# EAGLE board M8340E (EAGLE 6.6.0), part 1 of 2
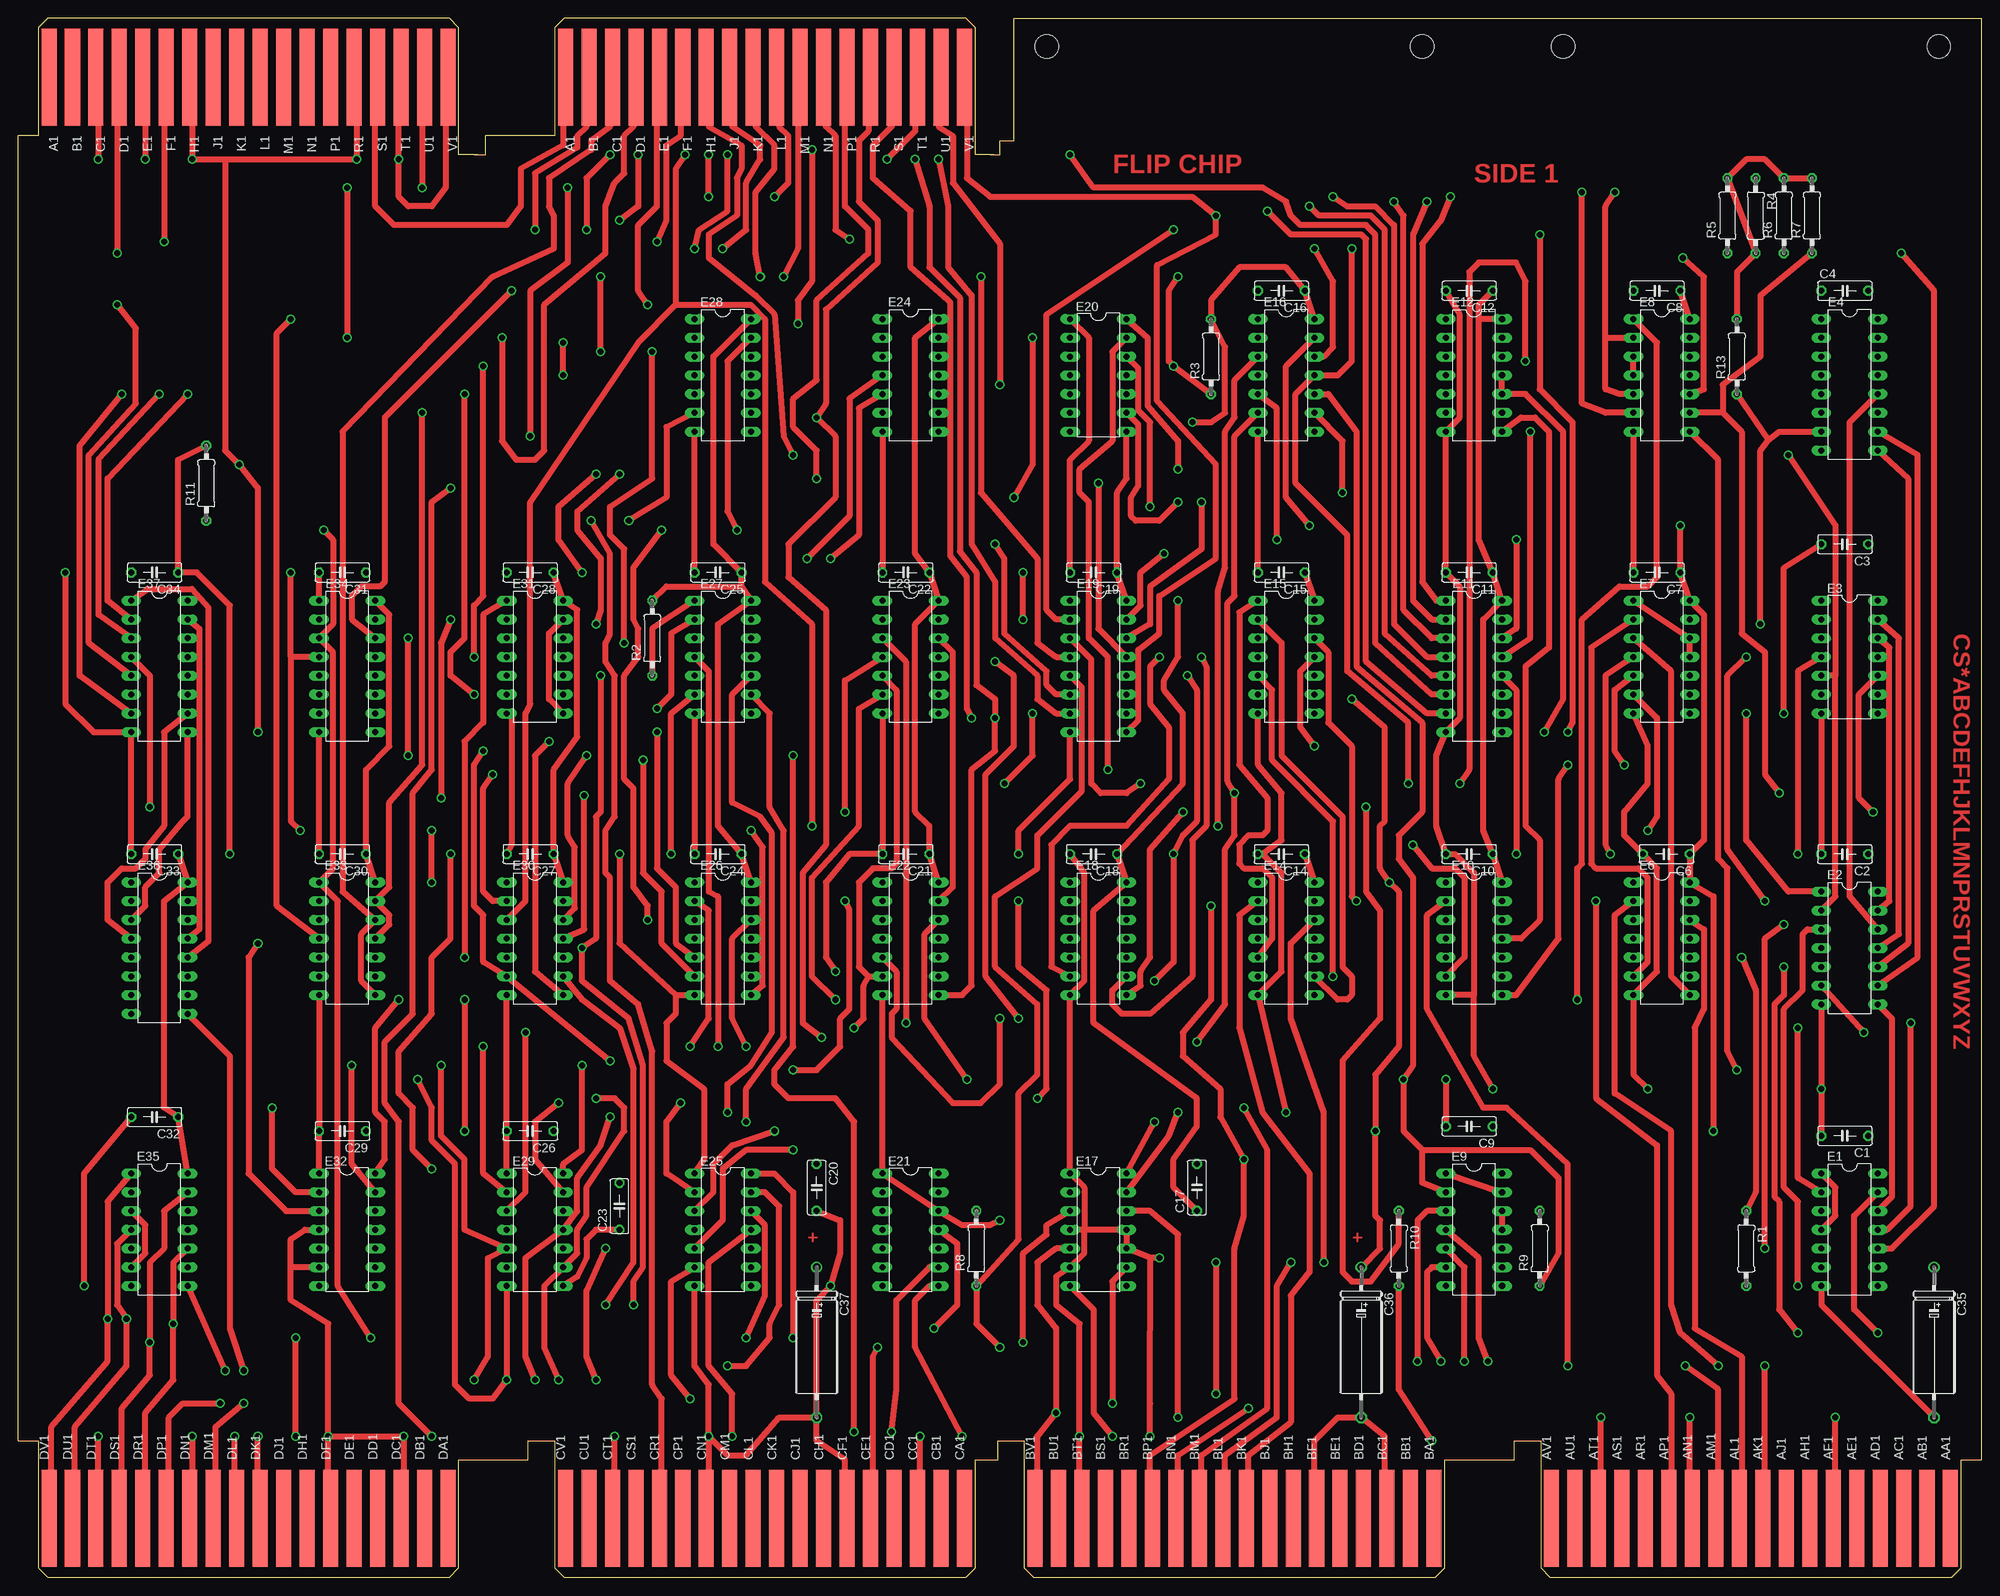
[diagram p0: board, top side]
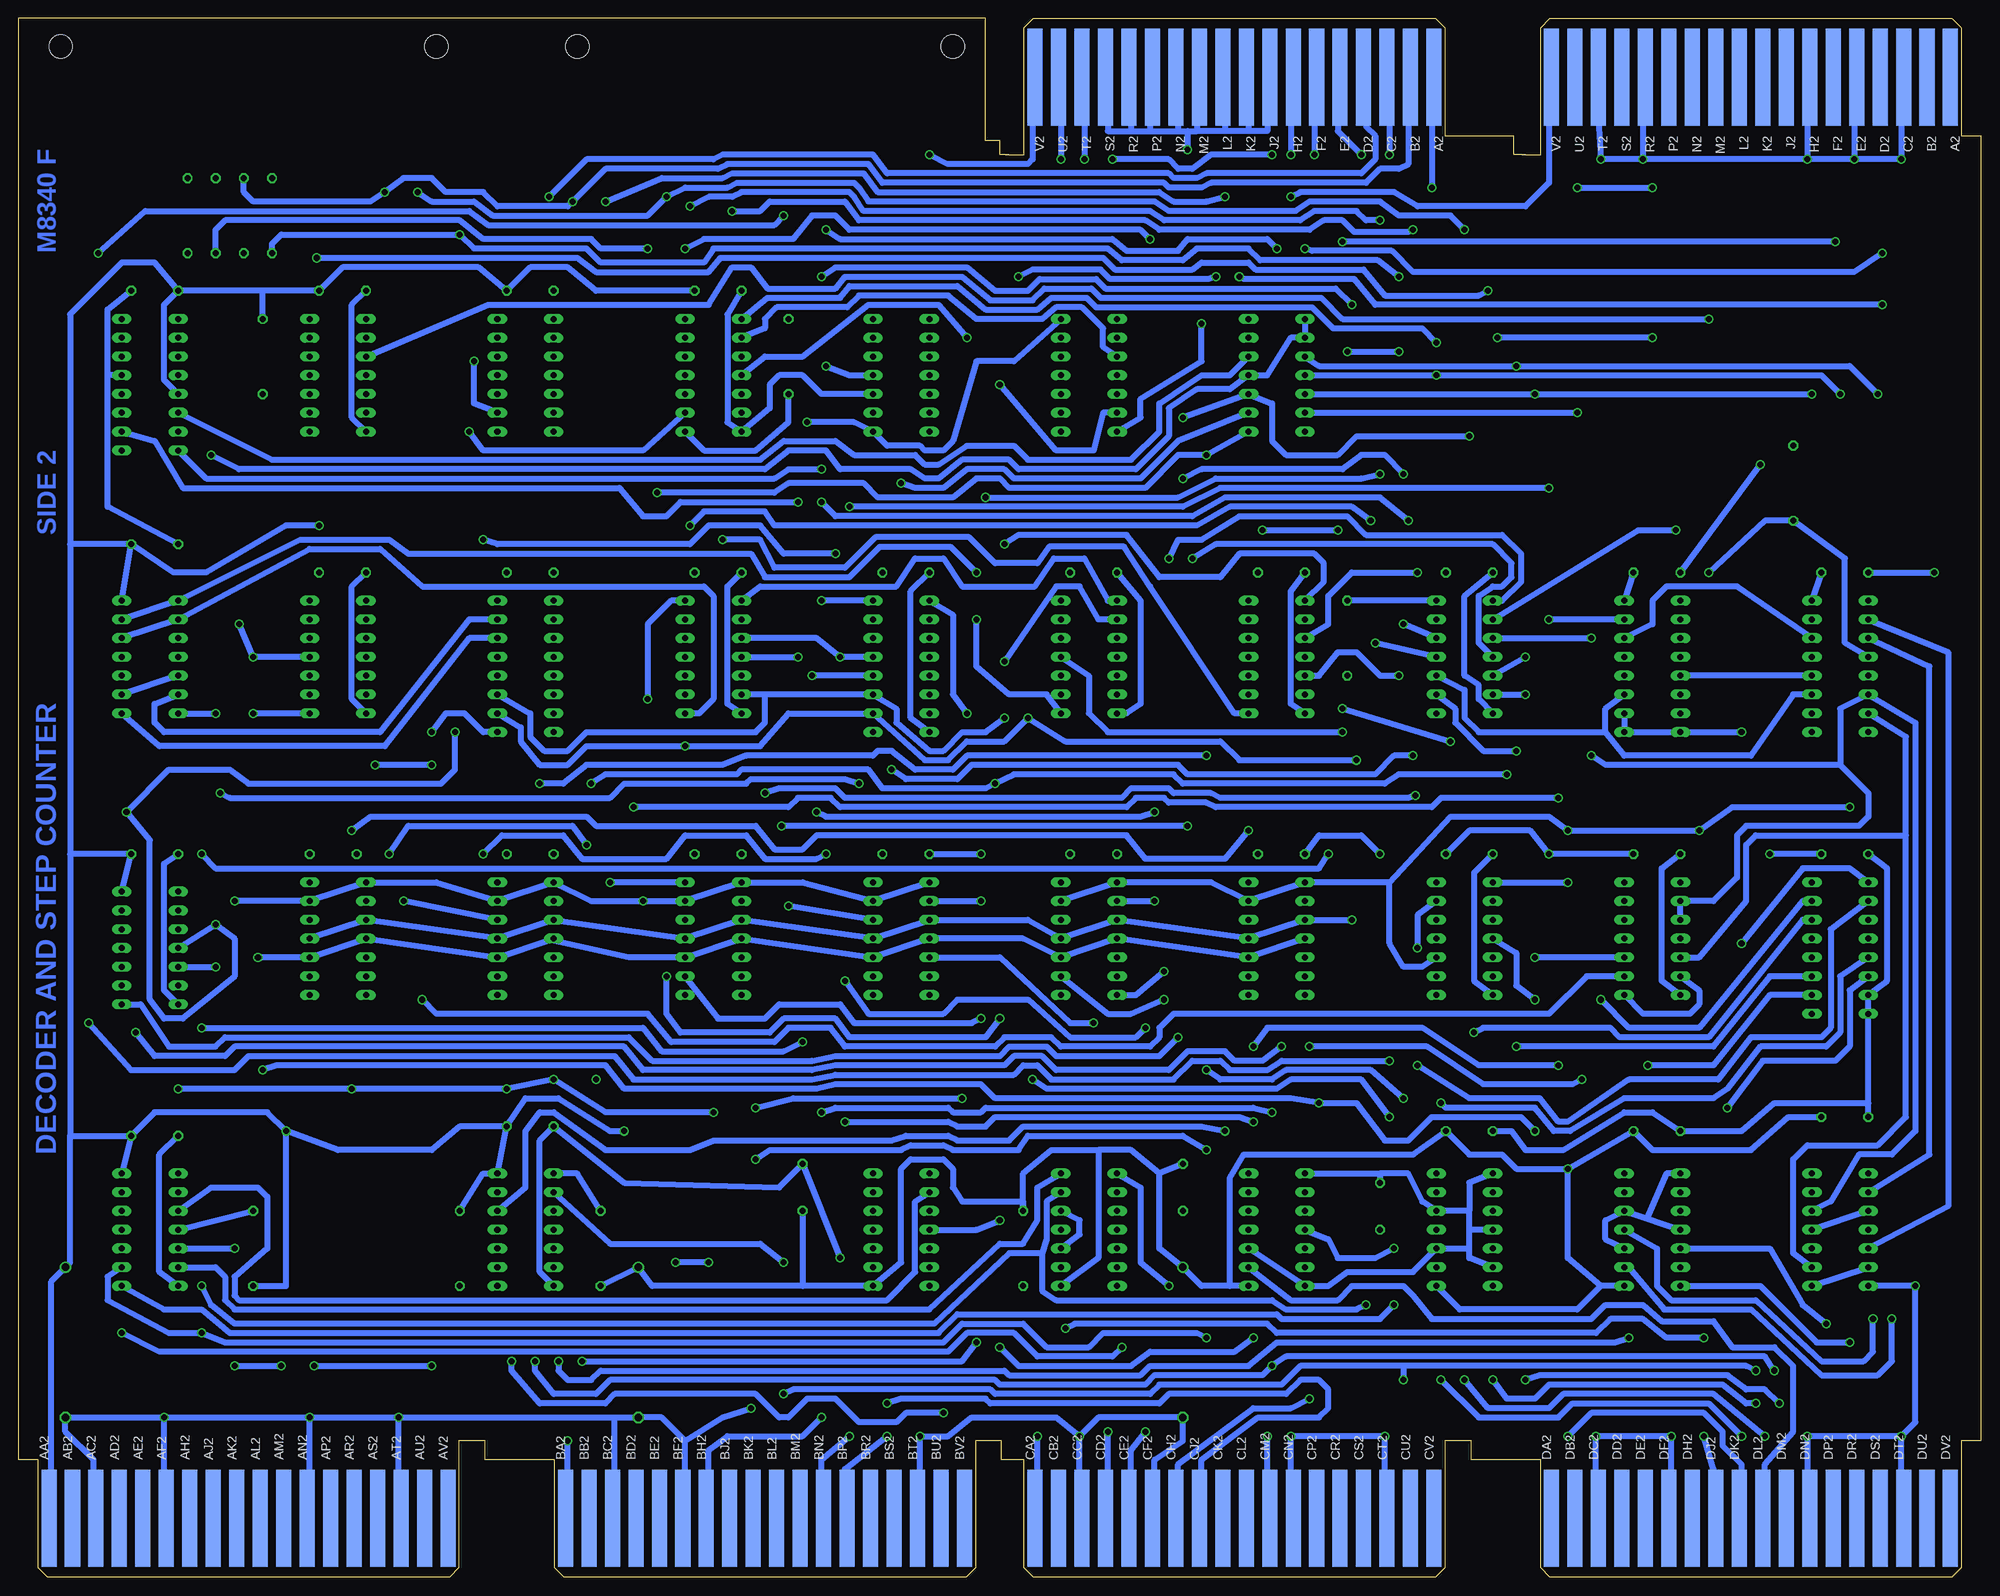
[diagram p1: board, bottom side, seen from below]

Size 265.43 x 210.82 mm. Coordinates in mm from the lower left corner, seen from the top.
Outline: 61.59,192.41 63.18,192.41 63.18,194.94 69.85,194.94
Outline: 131.44,192.41 132.72,192.41 132.72,194.31 134.62,194.31 134.62,210.82 265.43,210.82 265.43,15.88
Outline: 0,194.94 0,18.41 0.64,18.41
Copper layers (1+16): Top 0.035mm / dielectric 1.5mm / Bottom 0.035mm
Design rules "16mils": minimum track width 16mil, minimum drill 32mil, track to track 15mil, track to pad 10mil, pad to pad 10mil, via to via 10mil, smd to smd 10mil, copper to edge 13mil, drill to drill 10mil, minimum pad ring 10mil, minimum via ring 8mil, stop-mask expansion 0mil, vias tented up to drill 0mil, thermal gap 10mil
Net classes: 1 supply: width 0.813 mm
Holes 3.2 mm at 139.06,207.01 189.87,207.01 208.91,207.01 259.71,207.01

## Footprints (pad centres in the part's own frame; a part is rotated, then mirrored left to right if it is on the bottom)
C063-025X075 = drill 0.813 octagon: 1 -2.54,0; 2 3.81,0
E12-8 = drill 1.016: + -10.16,0 | drill 1.016 octagon: - 10.16,0
DIL14 = drill 0.813 long: 1 -7.62,-3.81; 2 -5.08,-3.81; 3 -2.54,-3.81; 4 0,-3.81; 5 2.54,-3.81; 6 5.08,-3.81; 7 7.62,-3.81; 8 7.62,3.81; 9 5.08,3.81; 10 2.54,3.81; 11 0,3.81; 12 -2.54,3.81; 13 -5.08,3.81; 14 -7.62,3.81
DIL16 = drill 0.813 long: 1 -8.89,-3.81; 2 -6.35,-3.81; 3 -3.81,-3.81; 4 -1.27,-3.81; 5 1.27,-3.81; 6 3.81,-3.81; 7 6.35,-3.81; 8 8.89,-3.81; 9 8.89,3.81; 10 6.35,3.81; 11 3.81,3.81; 12 1.27,3.81; 13 -1.27,3.81; 14 -3.81,3.81; 15 -6.35,3.81; 16 -8.89,3.81
EDGE-CON2 = smd 13.106 x 2.032: A1 7.938,4.128; B1 7.938,7.303; C1 7.938,10.477; D1 7.938,13.652; E1 7.938,16.828; F1 7.938,20.003; H1 7.938,23.177; J1 7.938,26.352; K1 7.938,29.527; L1 7.938,32.703; M1 7.938,35.877; N1 7.938,39.053; P1 7.938,42.227; R1 7.938,45.403; S1 7.938,48.578; T1 7.938,51.752; U1 7.938,54.928; V1 7.938,58.102 | smd 13.106 x 2.032 bottom: A2 7.938,4.128; B2 7.938,7.303; C2 7.938,10.477; D2 7.938,13.652; E2 7.938,16.828; F2 7.938,20.003; H2 7.938,23.177; J2 7.938,26.352; K2 7.938,29.527; L2 7.938,32.703; M2 7.938,35.877; N2 7.938,39.053; P2 7.938,42.227; R2 7.938,45.403; S2 7.938,48.578; T2 7.938,51.752; U2 7.938,54.928; V2 7.938,58.102
0207/10 = drill 0.813 octagon: 1 -5.08,0; 2 5.08,0
EDGE-CON8 = smd 2.032 x 13.106: AA1 261.303,7.938; AB1 258.127,7.938; AC1 254.952,7.938; AD1 251.778,7.938; AE1 248.602,7.938; AF1 245.428,7.938; AH1 242.252,7.938; AJ1 239.077,7.938; AK1 235.903,7.938; AL1 232.727,7.938; AM1 229.553,7.938; AN1 226.377,7.938; AP1 223.202,7.938; AR1 220.028,7.938; AS1 216.852,7.938; AT1 213.678,7.938; AU1 210.502,7.938; AV1 207.327,7.938; BA1 191.452,7.938; BB1 188.278,7.938; BC1 185.102,7.938; BD1 181.928,7.938; BE1 178.752,7.938; BF1 175.577,7.938; BH1 172.403,7.938; BJ1 169.227,7.938; BK1 166.053,7.938; BL1 162.877,7.938; BM1 159.702,7.938; BN1 156.528,7.938; BP1 153.352,7.938; BR1 150.178,7.938; BS1 147.002,7.938; BT1 143.827,7.938; BU1 140.653,7.938; BV1 137.477,7.938; CA1 127.953,7.938; CB1 124.778,7.938; CC1 121.603,7.938; CD1 118.427,7.938; CE1 115.252,7.938; CF1 112.078,7.938; CH1 108.903,7.938; CJ1 105.728,7.938; CK1 102.552,7.938; CL1 99.377,7.938; CM1 96.203,7.938; CN1 93.028,7.938; CP1 89.853,7.938; CR1 86.677,7.938; CS1 83.502,7.938; CT1 80.328,7.938; CU1 77.153,7.938; CV1 73.978,7.938; DA1 58.102,7.938; DB1 54.928,7.938; DC1 51.752,7.938; DD1 48.578,7.938; DE1 45.403,7.938; DF1 42.227,7.938; DH1 39.053,7.938; DJ1 35.877,7.938; DK1 32.703,7.938; DL1 29.527,7.938; DM1 26.352,7.938; DN1 23.177,7.938; DP1 20.003,7.938; DR1 16.828,7.938; DS1 13.652,7.938; DT1 10.477,7.938; DU1 7.303,7.938; DV1 4.128,7.938 | smd 2.032 x 13.106 bottom: AA2 261.303,7.938; AB2 258.127,7.938; AC2 254.952,7.938; AD2 251.778,7.938; AE2 248.602,7.938; AF2 245.428,7.938; AH2 242.252,7.938; AJ2 239.077,7.938; AK2 235.903,7.938; AL2 232.727,7.938; AM2 229.553,7.938; AN2 226.377,7.938; AP2 223.202,7.938; AR2 220.028,7.938; AS2 216.852,7.938; AT2 213.678,7.938; AU2 210.502,7.938; AV2 207.327,7.938; BA2 191.452,7.938; BB2 188.278,7.938; BC2 185.102,7.938; BD2 181.928,7.938; BE2 178.752,7.938; BF2 175.577,7.938; BH2 172.403,7.938; BJ2 169.227,7.938; BK2 166.053,7.938; BL2 162.877,7.938; BM2 159.702,7.938; BN2 156.528,7.938; BP2 153.352,7.938; BR2 150.178,7.938; BS2 147.002,7.938; BT2 143.827,7.938; BU2 140.653,7.938; BV2 137.477,7.938; CA2 127.953,7.938; CB2 124.778,7.938; CC2 121.603,7.938; CD2 118.427,7.938; CE2 115.252,7.938; CF2 112.078,7.938; CH2 108.903,7.938; CJ2 105.728,7.938; CK2 102.552,7.938; CL2 99.377,7.938; CM2 96.203,7.938; CN2 93.028,7.938; CP2 89.853,7.938; CR2 86.677,7.938; CS2 83.502,7.938; CT2 80.328,7.938; CU2 77.153,7.938; CV2 73.978,7.938; DA2 58.102,7.938; DB2 54.928,7.938; DC2 51.752,7.938; DD2 48.578,7.938; DE2 45.403,7.938; DF2 42.227,7.938; DH2 39.053,7.938; DJ2 35.877,7.938; DK2 32.703,7.938; DL2 29.527,7.938; DM2 26.352,7.938; DN2 23.177,7.938; DP2 20.003,7.938; DR2 16.828,7.938; DS2 13.652,7.938; DT2 10.477,7.938; DU2 7.303,7.938; DV2 4.128,7.938

## Placement (x,y rotation side)
C1  .01uF  [C063-025X075]  247.65,59.69 180 top
C2  .01uF  [C063-025X075]  247.65,97.79 180 top
C3  .01uF  [C063-025X075]  247.65,139.7 180 top
C4  .01uF  [C063-025X075]  246.38,173.99 0 top
C6  .01uF  [C063-025X075]  223.52,97.79 180 top
C7  .01uF  [C063-025X075]  222.25,135.89 180 top
C8  .01uF  [C063-025X075]  222.25,173.99 180 top
C9  .01uF  [C063-025X075]  196.85,60.96 180 top
C10  .01uF  [C063-025X075]  196.85,97.79 180 top
C11  .01uF  [C063-025X075]  196.85,135.89 180 top
C12  .01uF  [C063-025X075]  196.85,173.99 180 top
C14  .01uF  [C063-025X075]  171.45,97.79 180 top
C15  .01uF  [C063-025X075]  171.45,135.89 180 top
C16  .01uF  [C063-025X075]  171.45,173.99 180 top
C17  .01uF  [C063-025X075]  159.38,52.07 90 top
C18  .01uF  [C063-025X075]  146.05,97.79 180 top
C19  .01uF  [C063-025X075]  146.05,135.89 180 top
C20  .01uF  [C063-025X075]  107.95,53.34 270 top
C21  .01uF  [C063-025X075]  120.65,97.79 180 top
C22  .01uF  [C063-025X075]  120.65,135.89 180 top
C23  .01uF  [C063-025X075]  81.28,49.53 90 top
C24  .01uF  [C063-025X075]  95.25,97.79 180 top
C25  .01uF  [C063-025X075]  95.25,135.89 180 top
C26  .01uF  [C063-025X075]  69.85,60.33 180 top
C27  .01uF  [C063-025X075]  69.85,97.79 180 top
C28  .01uF  [C063-025X075]  69.85,135.89 180 top
C29  .01uF  [C063-025X075]  44.45,60.33 180 top
C30  .01uF  [C063-025X075]  44.45,97.79 180 top
C31  .01uF  [C063-025X075]  44.45,135.89 180 top
C32  .01uF  [C063-025X075]  19.05,62.23 180 top
C33  .01uF  [C063-025X075]  19.05,97.79 180 top
C34  .01uF  [C063-025X075]  19.05,135.89 180 top
C35  6.8uF  [E12-8]  259.08,31.75 270 top
C36  6.8uF  [E12-8]  181.61,31.75 270 top
C37  6.8uF  [E12-8]  107.95,31.75 270 top
E1  SN97401  [DIL14]  247.65,46.99 270 top
E2  74H04N  [DIL14]  247.65,85.09 270 top
E3  74H20N  [DIL14]  247.65,124.46 270 top
E4  74H106N  [DIL16]  247.65,161.29 270 top
E6  7474N  [DIL14]  222.25,86.36 270 top
E7  74H30N  [DIL14]  222.25,124.46 270 top
E8  7402N  [DIL14]  222.25,162.56 270 top
E9  SN97401  [DIL14]  196.85,46.99 270 top
E10  7474N  [DIL14]  196.85,86.36 270 top
E11  DEC23001A1  [DIL16]  196.85,123.19 270 top
E12  74H11N  [DIL14]  196.85,162.56 270 top
E14  7474N  [DIL14]  171.45,86.36 270 top
E15  74H30N  [DIL14]  171.45,124.46 270 top
E16  74H04N  [DIL14]  171.45,162.56 270 top
E17  SP384N  [DIL14]  146.05,46.99 270 top
E18  7474N  [DIL14]  146.05,86.36 270 top
E19  DEC23002A1  [DIL16]  146.05,123.19 270 top
E20  SP380N  [DIL14]  146.05,162.56 270 top
E21  SP384N  [DIL14]  120.65,46.99 270 top
E22  7474N  [DIL14]  120.65,86.36 270 top
E23  74H30N  [DIL14]  120.65,124.46 270 top
E24  7410N  [DIL14]  120.65,162.56 270 top
E25  SP380N  [DIL14]  95.25,46.99 270 top
E26  7474N  [DIL14]  95.25,86.36 270 top
E27  74H00N  [DIL14]  95.25,124.46 270 top
E28  74H11N  [DIL14]  95.25,162.56 270 top
E29  SP384N  [DIL14]  69.85,46.99 270 top
E30  74H74N  [DIL14]  69.85,86.36 270 top
E31  7402N  [DIL14]  69.85,124.46 270 top
E32  SP384N  [DIL14]  44.45,46.99 270 top
E33  7412N  [DIL14]  44.45,86.36 270 top
E34  74193N  [DIL16]  44.45,123.19 270 top
E35  SN97401  [DIL14]  19.05,46.99 270 top
E36  MC8266  [DIL16]  19.05,85.09 270 top
E37  74193N  [DIL16]  19.05,123.19 270 top
H  EDGE-TOP  [EDGE-CON2]  69.85,210.82 270 top
J  EDGE-TOP  [EDGE-CON2]  0,210.82 270 top
R1  750  [0207/10]  233.68,44.45 270 top
R2  470  [0207/10]  85.72,127 90 top
R3  470  [0207/10]  161.29,165.1 90 top
R4  470  [0207/10]  234.95,184.15 270 top
R5  470  [0207/10]  231.14,184.15 90 top
R6  470  [0207/10]  238.76,184.15 90 top
R7  470  [0207/10]  242.57,184.15 90 top
R8  470  [0207/10]  129.54,44.45 90 top
R9  1K  [0207/10]  205.74,44.45 90 top
R10  470  [0207/10]  186.69,44.45 270 top
R11  330  [0207/10]  25.4,147.96 90 top
R13  330  [0207/10]  232.41,165.1 90 top
U$2  QUAD  [EDGE-CON8]  0,0 0 top

## Library data of the parts
C1-C4 C6-C12 C14-C37 E3 E17 E20 E21 E25 E29 E32 E34 E36 E37 H J U$2 = dec-con
E1 E2 E4 E6-E10 E12 E14-E16 E18 E22-E24 E26-E28 E30 E31 E33 E35 = 74xx-us
E11 E19 = memory
R1-R11 R13 = rcl

## Nets
0_TO_EIR: E1.1 E1.4 E6.4 E6.10 E10.4 E10.10 E14.4 E14.10 E18.4 E18.10 E22.4 E22.10 E26.4 E26.10 R1.1
0_TO_SC: E8.10 E34.14 E37.14
!ADLK_DIS: E11.6 H.V2
!DAD+DST: E16.8 E20.11 H.E1 R3.1
!E: E1.9 E2.5 E25.14
!EX1: E27.2 E30.8
!FETCH: E1.5 E2.4 E3.10 E12.10 E12.11
!INIT: E4.8 E20.14
!SC_0: E24.6 H.U1
!SC_LOAD: E31.10 E34.11 E37.11
!SGT: H.F1 J.F1
!TP3: E8.8 E25.2 E30.4
+3V: E22.1 E22.13 E23.12 E26.1 E26.13 E30.1 E30.10 E34.4 E37.4 R11.1
+3V0: E4.7 E6.1 E6.13 E7.1 E7.11 E7.12 E10.1 E10.13 E14.1 E14.13 E15.12 E18.1 E18.13 R13.1
BE: E2.6 E27.4
BFETCH: E2.3 E21.13 E27.5 E30.13
BMD8: E29.14 E36.2
BMD9: E29.13 E36.5
BMD10: E29.2 E36.11
BMD11: E29.3 E36.14
C0: E1.13 U$2.CE1
CLOCK: H.D1 J.U1
DAD+DST: E11.13 E16.9 E28.8 H.H1
DATA7: E9.4 E17.5 U$2.BV1
DATA8: E32.5 E35.10 U$2.DR1
DATA9: E32.7 E35.13 U$2.DS1
DATA10: E32.11 E35.4 U$2.DU1
DATA11: E32.9 E35.1 U$2.DV1
DATA_TO_SC: E9.2 E16.10 E25.4 E36.9 R9.1
DEFER: E20.12 U$2.DK2
DIV_12_L: E16.12 H.N1
E: E25.9 U$2.DL2
EAE_INST: E2.2 E3.5 E3.9 E28.1 E28.2 E28.11
EIR2: E11.11 E15.6 E19.11 E22.8 H.T2
EIR3: E11.10 E15.11 E19.10 E26.6 H.S1
EX1: E1.8 E30.9
EXEC_DIVIDE: E8.3 E8.4 E33.4
EXEC_MULTIPLY: E8.1 E33.9
FD_SET: E19.7 H.U2
FE_SET: E1.10 E19.9 H.V1
FETCH: E21.11 U$2.DJ2
GND [supply]: C1.2 C2.2 C3.2 C4.2 C6.2 C7.2 C8.2 C9.2 C10.2 C11.2 C12.2 C14.2 C15.2 C16.2 C17.2 C18.2 C19.2 C20.2 C21.2 C22.2 C23.2 C24.2 C25.2 C26.2 C27.2 C28.2 C29.2 C30.2 C31.2 C32.2 C33.2 C34.2 C35.- C36.- C37.- E1.7 E2.7 E3.7 E4.13 E6.7 E7.7 E8.7 E9.7 E10.7 E11.8 E12.7 E14.7 E15.7 E16.7 E17.1 E17.4 E17.6 E17.10 E17.11 E18.7 E19.8 E20.1 E20.10 E21.1 E21.10 E21.12 E22.7 E23.7 E24.7 E25.1 E25.7 E25.10 E26.7 E27.7 E28.7 E29.1 E29.4 E29.6 E29.10 E29.12 E30.7 E31.7 E32.1 E32.4 E32.6 E32.10 E32.12 E33.7 E34.1 E34.8 E34.9 E34.10 E35.7 E36.7 E36.8 E37.8 H.J2 H.K2 H.L2 H.M2 H.N2 H.P2 H.R2 H.S2 J.C1 J.C2 J.E1 J.E2 J.H1 J.H2 J.R1 J.R2 J.T1 J.T2 J.V1 U$2.AC2 U$2.AF1 U$2.AF2 U$2.AN1 U$2.AN2 U$2.AT1 U$2.AT2 U$2.BC1 U$2.BC2 U$2.BF1 U$2.BF2 U$2.BN1 U$2.BN2 U$2.BT1 U$2.BT2 U$2.CC1 U$2.CC2 U$2.CF1 U$2.CF2 U$2.CN1 U$2.CN2 U$2.CT1 U$2.CT2 U$2.DC1 U$2.DC2 U$2.DF1 U$2.DF2 U$2.DN1 U$2.DN2 U$2.DT1 U$2.DT2
GTF+IND: H.A1 J.S1
INCR_SC: E37.5 H.K1
INIT: E20.9 U$2.CR1
INT_IN_PROG: E17.7 U$2.BP2
LAST_STEP_L: E33.6 E33.8 E33.12 H.C1
LD_EIR: E6.3 E6.11 E10.3 E10.11 E12.8 E14.3 E14.11 E18.3 E18.11 E22.3 E22.11 E26.3 E26.11 E28.13
MA_MS_LC: E17.12 U$2.BH2
MD0: E6.2 U$2.AK1
MD1: E6.12 U$2.AL1
MD2: E10.2 U$2.AM1
MD3: E10.12 U$2.AP1
MD4: E14.2 U$2.BK1
MD5: E14.12 U$2.BL1
MD6: E18.2 U$2.BM1
MD7: E18.12 E25.5 U$2.BP1
MD8: E22.2 E29.9 U$2.DK1
MD9: E22.12 E29.11 U$2.DL1
MD10: E26.2 E29.7 U$2.DM1
MD11: E26.12 E29.5 U$2.DP1
MODEA: E2.9 E4.10 E19.14
MODEB: E1.12 E2.8 E28.10 H.A2 H.R1
N$1: E6.6 E7.2
N$2: E6.8 E7.3
N$3: E14.5 E15.1 E23.1
N$4: E7.4 E10.6
N$5: E7.5 E10.8
N$6: E2.1 E7.8
N$7: E7.6 E26.8
N$8: E14.9 E15.2 E23.2
N$9: E15.3 E18.6 E19.13 E28.9
N$10: E15.4 E18.9
N$11: E15.5 E22.5
N$14: E18.5 E23.3
N$15: E18.8 E23.4
N$16: E11.12 E19.12 E22.6 E23.5
N$17: E22.9 E23.6
N$18: E23.11 E26.5
N$19: E31.3 E33.2 E33.3 E35.12 E37.6
N$20: E16.13 E28.6 E33.11 E33.13
N$21: E3.8 E11.14 E19.15
N$22: E2.12 E4.12
N$23: E2.10 E4.9
N$24: E3.4 E27.6
N$25: E3.6 E11.15
N$26: E1.11 E30.6 E31.9
N$27: E4.6 E28.12
N$28: E1.6 E21.14
N$29: E1.3 E17.2
N$30: E32.3 E36.1
N$31: E32.2 E36.6
N$32: E32.13 E36.10
N$33: E32.14 E36.15
N$34: E36.13 E37.15
N$35: E36.12 E37.1
N$36: E36.4 E37.10
N$37: E36.3 E37.9
N$38: E9.6 E31.2 E33.1 E34.3
N$39: E16.1 E28.4 E35.2 E37.3
N$40: E28.5 E31.6 E35.5 E37.2
N$41: E17.13 E27.10
N$42: E28.3 E31.5 E33.5 E35.9 E37.7
N$43: E9.11 E9.12 E25.3
N$44: E9.1 E9.13 E34.15 R10.1
N$45: E9.3 E17.3
N$46: E34.5 E37.12
N$47: E16.2 E24.3
N$48: E24.4 E31.4
N$49: E24.5 E31.1 E33.10
N$50: E17.14 E27.9
N$51: E16.5 E27.8
N$52: E1.2 E16.6 E30.11
N$53: E20.13 E30.12
N$54: E31.8 E31.13
N$55: E16.4 E31.12
NEXT_LOC: E27.3 H.P1
RESTART: H.H2 J.V2
ROM_11_L: E11.1 H.D2
ROM_12_L: E8.2 E8.5 E11.2 H.B2 R4.1
ROM_13_L: E11.3 H.L1
ROM_14_L: E8.6 E11.4 H.B1
ROM_15_L: E11.5 H.E2
ROM_17_L: E11.7 H.C2
ROM_19_L: E11.9 E31.11 R5.1
ROM_21_L: E16.11 E19.1 E30.2 R6.1
ROM_22_L: E19.2 H.J1
ROM_23_L: E8.9 E19.3 R7.1
ROM_24_L: E19.4 H.M1
ROM_25_L: E19.5 E25.12 R8.1
ROM_26_L: E19.6 E27.1 R2.1
RTF: H.T1 J.D1
SC_TO_DATA: E9.5 E25.13 E35.3 E35.6 E35.8 E35.11
SWAB: E2.11 E3.1 E3.13 E23.8
SWBA: E2.13 E3.2 E3.12 E15.8
TP1: E21.9 U$2.CD2
TP2: E12.9 U$2.CE2
TP2_D: E16.3 E30.3 H.F2
TP3: E25.6 U$2.CH2
TP4: E17.9 U$2.CJ2
TS3: E25.11 U$2.CM2
VCC [supply]: C1.1 C2.1 C3.1 C4.1 C6.1 C7.1 C8.1 C9.1 C10.1 C11.1 C12.1 C14.1 C15.1 C16.1 C17.1 C18.1 C19.1 C20.1 C21.1 C22.1 C23.1 C24.1 C25.1 C26.1 C27.1 C28.1 C29.1 C30.1 C31.1 C32.1 C33.1 C34.1 C35.+ C36.+ C37.+ E1.14 E2.14 E3.14 E4.5 E6.14 E7.14 E8.14 E9.14 E10.14 E11.16 E12.14 E14.14 E15.14 E16.14 E17.8 E18.14 E19.16 E20.8 E21.8 E22.14 E23.14 E24.14 E25.8 E26.14 E27.14 E28.14 E29.8 E30.14 E31.14 E32.8 E33.14 E34.16 E35.14 E36.16 E37.16 R1.2 R2.2 R3.2 R4.2 R5.2 R6.2 R7.2 R8.2 R9.2 R10.2 R11.2 R13.2 U$2.AA2 U$2.BA2 U$2.CA2

## Tracks (layer width: path | path; a pad name or v marks a point on that pad's centre or on a via)
0_TO_EIR  (via drill 0.81)
  Top 0.813: v233.04,83.82 234.95,79.38 234.95,52.07 R1.1 | E1.4 245.75,48.9 245.75,52.7 E1.1
  Bottom 0.813: E1.4 R1.1 | E26.4 E26.10 E22.4 E22.10 129.54,86.36 E18.4 E18.10 E14.4 E14.10 182.88,83.82 193.61,86.17 | 193.61,86.17 E10.10 E6.4 E6.10 v233.04,83.82 | 193.61,86.17 E10.4
0_TO_SC  (via drill 0.81 pad 0.25)
  Top 0.813: E8.10 227.97,160.66 227.97,175.9 v225.11,178.44 | v66.67,173.99 49.53,156.84 49.53,134.62 48.9,133.99 46.35,133.99 45.09,132.72 45.09,129.54 E34.14
  Bottom 0.813: E37.14 33.02,133.99 42.55,133.99 44.45,132.08 44.45,128.91 E34.14 | v225.11,178.44 189.87,178.44 187.32,176.53 172.09,176.53 170.5,178.44 118.75,178.44 117.16,176.85 106.68,176.85 105.41,177.8 99.06,177.8 98.11,176.85 83.5,176.85 80.64,173.35 67.94,173.35 v66.67,173.99
!ADLK_DIS  (via drill 0.81 pad 0.25)
  Top 0.813: E11.6 191.13,119.38 183.51,126.36 183.51,181.61 182.25,182.88 173.35,182.88 172.09,184.15 171.45,186.06 168.28,187.96 145.41,187.96 v142.24,192.41
  Bottom 0.813: v142.24,192.41 139.7,191.13 128.91,191.13 128.27,191.77 128.27,202.56 H.V2
!DAD+DST  (via drill 0.81)
  Top 0.813: R3.1 v156.21,163.83 155.57,164.47 155.57,173.99 v156.84,175.9 | v85.09,172.09 83.82,173.99 83.82,182.88 86.36,185.42 86.36,201.29 H.E1
  Bottom 0.813: E16.8 172.72,152.4 165.74,152.4 161.29,156.21 R3.1 | v156.21,163.83 153.03,162.56 E20.11 | v156.84,175.9 154.94,177.16 137.16,177.16 133.35,173.99 128.91,173.99 127.32,175.58 119.7,175.58 118.43,174.31 87.31,174.31 v85.09,172.09
!E  (via drill 0.81)
  Top 0.813: E25.14 102.23,54.61 104.78,52.07 v104.78,32.38 | v238.76,82.55 238.76,78.74 237.49,77.47 237.49,51.44 238.12,50.8 238.12,36.2 v240.66,33.02
  Bottom 0.813: E1.9 253.37,40.64 253.37,37.47 245.11,33.02 v240.66,33.02 237.49,31.75 140.34,31.75 137.79,34.29 129.54,34.29 126.36,31.11 120.65,31.11 118.75,33.02 106.05,33.02 v104.78,32.38 | E2.5 v238.76,82.55
!EX1  (via drill 0.81)
  Top 0.813: E27.2 88.27,127.64 88.27,119.38 v86.36,117.47 | v71.75,113.03 69.85,111.12 69.85,81.92 E30.8
  Bottom 0.813: v86.36,117.47 v71.75,113.03
!FETCH  (via drill 0.81)
  Top 0.813: v206.38,114.3 208.91,118.75 208.91,154.94 203.84,160.02 E12.10 E12.11 | v236.22,44.45 236.22,86.36 v238.76,88.27 | v250.82,103.5 248.92,105.41 248.92,119.38 E3.10
  Bottom 0.813: E2.4 v238.76,88.27 236.22,86.36 236.22,81.28 243.21,75.56 245.75,75.56 247.65,78.11 247.65,99.69 v250.82,103.5 245.11,109.22 236.85,109.22 234.31,107.31 208.28,107.31 206.38,109.22 v206.38,114.3 | E1.5 v236.22,44.45
!INIT  (via drill 0.81)
  Top 0.813: E20.14 152.72,167.64 152.72,158.43 156.84,153.67 v156.84,149.86
  Bottom 0.813: E4.8 240.03,148.59 163.19,148.59 161.29,149.86 v156.84,149.86
!SC_0  (via drill 0.81)
  Top 0.813: H.U1 124.46,201.29 124.46,196.22 126.36,194.94 126.36,188.59 132.72,180.34 v132.72,161.29
  Bottom 0.813: E24.6 118.75,157.48 120.02,152.4 125.09,152.4 v132.72,161.29
!SC_LOAD
  Bottom 0.813: E37.11 25.4,119.38 31.11,111.12 48.26,111.12 50.8,114.3 | 50.8,114.3 50.8,117.47 E34.11 | E31.10 69.85,120.02 69.85,116.2 67.94,114.3 50.8,114.3
!SGT  (via drill 0.81 pad 0.25)
  Top 0.813: J.F1 19.68,202.56 v19.68,180.66 | v86.36,180.66 87.63,183.51 87.63,193.68 89.53,194.94 89.53,200.66 H.F1
  Bottom 0.813: v19.68,180.66 v86.36,180.66
!TP3  (via drill 0.81, 0.81 pad 0.25)
  Top 0.813: E25.2 87.63,54.61 87.63,61.59 v89.53,64.14 | v60.33,78.11 v60.33,60.33 | v232.41,68.58 231.14,71.12 231.14,95.89 229.87,97.16 229.87,151.13 E8.8
  Bottom 0.813: E30.4 62.87,84.45 62.87,80.01 v60.33,78.11 | v60.33,60.33 62.23,62.23 74.3,62.23 77.47,59.05 80.64,59.05 84.45,64.14 v89.53,64.14 93.34,64.77 133.35,64.77 135.25,66.67 154.94,66.67 157.48,66.04 183.51,66.04 186.06,69.22 230.5,69.22 v232.41,68.58
+3V  (via drill 0.81)
  Top 0.813: E37.4 17.78,121.92 v17.78,104.14 | E34.4 36.83,124.46 | 36.83,124.46 v36.83,135.89 | 36.83,124.46 36.83,102.23 v38.1,100.97 | v55.88,93.98 v55.88,100.97 | E22.13 126.36,93.34 126.36,125.09 E23.12
  Bottom 0.813: E37.4 18.41,126.36 18.41,137.79 R11.1 29.21,142.88 v36.83,135.89 | E30.1 v55.88,93.98 | E30.10 75.56,82.55 78.11,82.55 80.01,85.72 80.01,93.98 | 80.01,93.98 E26.1 E26.13 104.14,93.98 E22.1 E22.13 | 80.01,93.98 71.75,102.87 58.42,102.87 v55.88,100.97 v38.1,100.97 33.66,104.14 v17.78,104.14
+3V0  (via drill 0.81)
  Top 0.813: E4.7 238.12,154.94 236.65,153.82 | R13.1 236.65,153.82 | E7.1 E7.12 E7.11 | 236.65,153.82 235.59,152.4 v235.59,128.91 | v233.68,124.46 231.14,121.92 231.14,98.42 v236.22,91.44 | E15.12 177.16,125.09 177.16,115.57 180.34,112.39 180.34,92.08 v180.97,91.44
  Bottom 0.813: E7.11 v233.68,124.46 v235.59,128.91 | v236.22,91.44 E6.13 E6.1 208.91,93.98 E10.13 E10.1 187.96,91.44 v180.97,91.44 E14.13 E14.1 159.38,93.98 E18.13 E18.1
BE  (via drill 0.81 pad 0.25)
  Top 0.813: E27.4 93.34,122.56 93.34,92.71 94.61,92.08 v94.61,71.75 | v249.56,73.66 E2.6
  Bottom 0.813: v94.61,71.75 97.16,69.85 100.97,69.85 102.23,71.12 107.31,71.12 109.86,68.58 125.09,68.58 127,70.48 130.81,70.48 132.08,69.22 154.94,69.22 158.12,68.58 180.97,68.58 183.51,71.75 236.22,71.75 237.49,70.48 247.01,70.48 v249.56,73.66
BFETCH  (via drill 0.81)
  Top 0.813: v83.19,36.83 83.19,40.01 84.45,41.91 84.45,69.22 82.55,75.56 76.2,80.64 v76.2,85.09 78.11,86.36 78.11,102.87 78.74,103.5 v78.74,121.92 | v240.66,39.37 240.66,50.8 238.76,52.7 238.76,76.83 241.3,79.38 241.3,87 241.94,87.63 E2.3
  Bottom 0.813: E30.13 76.2,89.53 v76.2,85.09 | E21.13 126.36,50.8 126.36,45.72 127,43.81 | 127,43.81 127,38.73 125.09,37.47 95.89,37.47 93.98,36.2 84.45,36.2 v83.19,36.83 | 127,43.81 131.44,43.81 141.6,34.29 236.22,34.29 239.4,36.83 v240.66,39.37 | E27.5 89.53,121.92 87,125.09 84.45,125.09 81.28,121.92 v78.74,121.92
BMD8  (via drill 0.81)
  Top 0.813: E29.14 73.66,55.88 76.2,57.78 v76.2,69.22
  Bottom 0.813: E36.2 20.32,87.63 20.32,74.3 21.59,73.03 31.11,73.03 35.56,67.31 47.62,67.31 55.88,61.59 57.15,61.59 59.69,64.77 69.22,64.77 v76.2,69.22
BMD9  (via drill 0.81)
  Top 0.813: v73.03,64.14 69.85,61.59 69.85,56.52 E29.13
  Bottom 0.813: E36.5 19.05,81.28 19.05,73.66 20.95,71.75 29.84,71.75 34.29,66.04 36.2,64.77 48.26,64.77 55.56,60.33 57.78,60.33 60.33,63.5 72.39,63.5 v73.03,64.14
BMD10  (via drill 0.81)
  Top 0.813: E29.2 62.87,54.61 v62.87,71.75
  Bottom 0.813: E36.11 28.57,81.28 36.2,71.75 v62.87,71.75
BMD11  (via drill 0.81)
  Top 0.813: E29.3 68.58,52.07 v68.58,73.66
  Bottom 0.813: E36.14 24.13,88.9 36.83,73.03 48.9,73.03 50.16,74.3 67.31,74.3 v68.58,73.66
C0  (via drill 0.81 pad 0.25)
  Top 0.813: U$2.CE1 115.57,8.26 115.57,29.84 v116.2,31.11 | v251.46,33.02 248.28,36.2 248.28,48.9 E1.13
  Bottom 0.813: v116.2,31.11 117.47,29.84 127.64,29.84 130.81,33.02 137.16,33.02 139.7,30.48 246.38,30.48 v251.46,33.02
CLOCK  (via drill 0.81 pad 0.25)
  Top 0.813: J.U1 54.61,201.29 v54.61,187.96 | v44.45,187.96 v44.45,167.64 | v65.41,167.64 65.41,153.67 67.31,151.13 69.85,151.13 71.12,152.4 71.12,172.09 79.38,179.07 79.38,185.42 80.64,188.59 81.92,189.87 81.92,194.94 83.19,196.22 83.19,201.93 H.D1
  Bottom 0.813: v54.61,187.96 v44.45,187.96 | v44.45,167.64 v65.41,167.64
DAD+DST  (via drill 0.81, 0.81 pad 0.25)
  Top 0.813: H.H1 93.34,200.66 93.34,196.22 97.79,193.68 97.79,190.5 97.16,189.23 97.16,184.15 93.34,181.61 93.34,178.44 99.69,173.35 102.23,170.81 103.5,154.31 v104.78,151.76 | v179.07,146.69 179.07,153.67 E16.9 | E11.13 204.47,127 v204.47,154.94
  Bottom 0.813: E28.8 v104.78,151.76 108.58,151.76 113.03,147.32 131.44,147.32 132.72,148.59 135.89,148.59 139.06,146.05 149.22,146.05 151.13,147.96 161.29,147.96 163.19,146.69 v179.07,146.69 | E16.9 180.97,152.4 202.56,152.4 v204.47,154.94
DATA7  (via drill 0.81 pad 0.25)
  Top 0.813: E17.5 140.34,44.45 137.79,42.55 137.79,36.83 140.34,33.66 v140.34,22.23 137.79,19.05 137.79,8.89 U$2.BV1 | v198.75,29.21 197.49,32.38 197.49,43.18 E9.4
  Bottom 0.813: v140.34,22.23 145.41,22.23 146.69,20.95 151.76,20.95 154.94,24.13 158.75,24.13 161.29,21.59 162.56,21.59 165.74,24.77 184.78,24.77 186.06,23.5 194.94,23.5 198.75,27.94 v198.75,29.21
DATA8  (via drill 0.81)
  Top 0.813: U$2.DR1 17.14,8.89 17.14,22.23 20.95,26.67 v20.95,34.29 20.95,42.55 E35.10
  Bottom 0.813: E32.5 28.57,44.45 24.13,36.83 v20.95,34.29
DATA9  (via drill 0.81)
  Top 0.813: U$2.DS1 13.97,9.53 13.97,22.86 17.78,27.3 v17.78,31.75 17.78,42.55 19.68,44.45 19.68,49.53 E35.13
  Bottom 0.813: E32.7 29.84,39.37 22.23,31.75 v17.78,31.75
DATA10  (via drill 0.81)
  Top 0.813: U$2.DU1 7.62,8.26 7.62,20.32 14.61,28.57 v14.61,34.92 13.34,36.83 13.34,45.09 E35.4
  Bottom 0.813: E32.11 43.81,44.45 43.81,39.37 41.91,37.47 30.48,37.47 21.59,29.21 15.88,29.21 14.61,30.48 v14.61,34.92
DATA11  (via drill 0.81)
  Top 0.813: U$2.DV1 4.45,9.53 4.45,20.32 12.06,29.21 v12.06,34.92 12.06,50.8 E35.1
  Bottom 0.813: E32.9 47.62,41.91 42.86,36.2 31.11,36.2 21.59,27.3 13.97,27.3 12.06,29.21 v12.06,34.92
DATA_TO_SC  (via drill 0.81, 0.81 pad 0.25)
  Top 0.813: E36.9 28.57,70.48 28.57,33.66 v30.48,27.94 | v78.11,26.67 76.83,29.84 76.83,38.73 v79.38,44.45 | v161.93,42.55 v161.93,24.77 | E9.2 189.87,53.34 189.87,57.78 | 189.87,57.78 204.47,57.78 208.28,53.98 208.28,43.81 R9.1 | E16.10 177.16,160.02 180.97,154.94 180.97,123.19 189.87,115.57 189.87,103.5 186.69,100.33 186.69,97.16 188.59,94.61 188.59,69.22 v187.32,67.31 187.32,60.33 189.87,57.78
  Bottom 0.813: E25.4 88.27,45.72 87,43.18 81.92,43.18 v79.38,44.45 | E9.2 185.42,45.09 165.1,45.09 v161.93,42.55 | v30.48,27.94 31.75,28.57 78.11,28.57 | 78.11,28.57 v78.11,26.67 | 78.11,28.57 92.08,28.57 94.61,26.04 111.12,26.04 112.39,24.77 133.35,24.77 133.99,25.4 160.66,25.4 v161.93,24.77
DEFER  (via drill 0.81)
  Top 0.813: v55.88,19.05 51.44,23.5 51.44,61.59 49.53,64.14 49.53,72.39 53.34,76.2 53.34,106.05 55.88,109.22 55.88,145.41 v58.42,147.32 | v153.03,144.78 153.03,156.21 151.45,157.8 151.45,163.51 E20.12
  Bottom 0.813: U$2.DK2 32.38,8.89 32.38,15.24 34.92,17.78 34.92,19.68 37.47,22.23 52.7,22.23 v55.88,19.05 | v58.42,147.32 102.87,147.32 107.95,144.78 v153.03,144.78
DIV_12_L  (via drill 0.81 pad 0.25)
  Top 0.813: E16.12 176.53,165.1 177.8,166.37 177.8,175.26 v175.26,179.71 | H.N1 109.22,201.29 109.22,196.22 110.49,194.94 110.49,182.25 v112.39,180.97
  Bottom 0.813: v175.26,179.71 172.72,180.97 160.66,180.97 158.12,184.15 154.94,184.15 153.03,182.25 113.67,182.25 v112.39,180.97
E
  Bottom 0.813: E25.9 93.34,37.47 87,37.47 85.09,39.37 78.11,39.37 76.83,38.1 74.3,34.92 52.7,34.92 50.8,36.83 45.72,36.83 43.18,34.61 36.2,34.61 33.66,31.11 27.94,31.11 25.4,28.57 25.4,19.68 29.21,15.24 29.21,9.53 U$2.DL2
EAE_INST  (via drill 0.81)
  Top 0.813: v239.4,151.76 245.75,142.24 245.75,121.92 | 245.75,121.92 E3.5 | E2.2 245.75,92.08 245.75,121.92
  Bottom 0.813: E3.5 E3.9 | E28.1 E28.2 93.34,167.64 96.52,162.56 E28.11 101.6,160.66 106.05,160.66 109.86,158.12 109.86,154.31 114.3,149.86 130.18,149.86 131.44,151.13 137.79,151.13 140.97,148.59 142.88,148.59 144.78,149.86 154.31,149.86 156.21,152.4 161.29,152.4 164.47,149.86 235.59,149.86 v239.4,151.76
EIR2  (via drill 0.81)
  Top 0.813: v121.28,191.77 123.19,185.42 123.19,177.16 127.32,173.04 127.32,138.75 129.54,135.89 129.54,120.65 132.08,118.75 v132.08,116.2 132.08,111.76 128.91,109.22 128.91,80.01 127.64,78.74 E22.8
  Bottom 0.813: E11.11 196.22,116.84 196.22,113.67 194.31,111.76 191.13,111.76 188.59,114.3 165.74,114.3 164.47,115.57 164.47,119.38 | 164.47,119.38 E15.6 | 164.47,119.38 E19.11 146.69,117.47 146.69,115.57 142.24,111.76 140.34,111.76 137.79,114.3 134.62,114.3 v132.08,116.2 | H.T2 121.28,201.93 v121.28,191.77
EIR3  (via drill 0.81)
  Top 0.813: v128.91,116.2 128.27,117.47 128.27,135.25 126.05,138.11 126.05,172.4 125.73,172.72 120.65,177.16 120.65,184.78 115.57,189.23 115.57,193.68 118.11,196.22 118.11,201.93 H.S1 | v84.45,110.49 84.45,95.25 87,92.71 87,85.72 E26.6 | v175.26,112.39 173.35,114.94 173.35,122.56 E15.11
  Bottom 0.813: E11.10 197.49,114.94 197.49,113.03 194.94,109.86 191.13,109.86 188.59,112.39 v175.26,112.39 165.1,112.39 161.29,116.84 E19.10 142.88,110.49 139.7,110.49 137.16,113.03 132.08,113.03 v128.91,116.2 123.83,113.03 102.87,113.03 100.33,110.49 v84.45,110.49
EX1  (via drill 0.81)
  Top 0.813: v79.38,36.83 83.19,42.55 83.19,68.58 81.28,74.3 76.2,78.11 E30.9
  Bottom 0.813: E1.8 245.75,36.2 240.66,36.2 236.85,33.02 140.97,33.02 138.43,35.56 95.25,35.56 94.61,34.92 81.28,34.92 v79.38,36.83
EXEC_DIVIDE  (via drill 0.81)
  Top 0.813: E33.4 34.92,90.81 34.92,168.28 v36.83,170.18 | E8.4 E8.3
  Bottom 0.813: E8.3 201.93,172.09 172.09,172.09 168.91,177.16 166.37,177.16 164.15,174.31 154.94,174.31 153.67,175.9 137.79,175.9 133.99,172.72 128.27,172.72 126.68,174.31 120.33,174.31 119.06,173.04 89.22,173.04 86.36,170.18 v36.83,170.18
EXEC_MULTIPLY  (via drill 0.81)
  Top 0.813: v210.82,78.11 210.82,95.89 211.46,96.52 211.46,129.54 216.53,133.99 220.34,133.99 221.62,135.25 221.62,167 E8.1
  Bottom 0.813: E33.9 53.34,81.28 58.42,76.2 109.22,76.2 111.12,74.3 111.12,73.03 112.39,71.75 124.46,71.75 125.73,73.03 132.08,73.03 133.35,71.75 153.67,71.75 155.57,74.3 161.29,74.3 163.19,72.39 177.16,72.39 180.34,76.2 208.91,76.2 v210.82,78.11
FD_SET  (via drill 0.81 pad 0.25)
  Top 0.813: v124.46,191.77 125.73,185.42 125.73,177.16 128.91,173.35 128.91,139.7 132.08,134.62 132.08,127 137.79,121.92 137.79,118.75 140.34,116.84 E19.7
  Bottom 0.813: H.U2 124.46,201.93 v124.46,191.77
FE_SET  (via drill 0.81 pad 0.25)
  Top 0.813: E1.10 253.37,44.45 259.08,50.16 259.08,173.99 v254.63,179.07 | H.V1 128.27,201.93 128.27,189.23 131.44,186.69 158.75,186.69 v161.93,184.15 161.93,181.61 153.99,177.48 153.99,159.07 161.93,150.5 161.93,137.79 154.31,132.72 154.31,127.64 151.45,125.41 151.45,115.89 E19.9
  Bottom 0.813: v254.63,179.07 248.28,184.78 204.47,184.78 201.93,182.88 163.19,182.88 v161.93,184.15
FETCH  (via drill 0.81)
  Top 0.813: v37.47,19.05 v37.47,32.38 | v123.83,33.66 127,36.83 127,45.09 E21.11
  Bottom 0.813: U$2.DJ2 36.2,8.89 36.2,14.61 v37.47,19.05 | v37.47,32.38 42.55,32.38 45.72,34.92 50.16,34.92 52.07,33.02 95.25,33.02 96.52,34.29 122.56,34.29 v123.83,33.66
GND  (via drill 0.81, 0.81 pad 0.25)
  Top 0.813: U$2.DF2 41.91,8.26 v41.91,19.05 | v41.91,19.05 v52.07,19.05 52.07,8.26 U$2.DC2 | U$2.DT2 10.79,8.26 v10.79,19.05 | v23.5,19.05 23.5,8.26 U$2.DN2 | U$2.CT2 80.64,8.89 v80.64,19.05 | v93.34,19.05 93.34,8.89 U$2.CN2 | J.E1 17.14,201.93 v17.14,191.77 | J.H1 23.5,202.56 v23.5,191.77 27.94,191.77 | J.C2 10.79,202.56 v10.79,191.77 | J.R1 45.72,202.56 v45.72,191.77 27.94,191.77 | J.T1 51.44,202.56 v51.44,191.77 51.44,186.69 52.7,185.42 55.88,185.42 57.78,187.96 57.78,201.93 J.V1 | U$2.BT2 143.51,8.26 v143.51,19.05 143.51,34.29 140.34,36.83 140.34,40.64 E17.6 144.15,43.81 144.15,46.99 | v8.89,39.37 8.89,54.61 C32.2 | v41.91,19.05 41.91,34.29 36.83,37.47 36.83,41.91 | 36.83,41.91 36.83,45.72 38.73,46.99 E32.4 | E32.6 36.83,41.91 | v93.34,19.05 95.89,16.51 98.42,16.51 102.87,21.59 C37.- | U$2.CF2 111.76,8.26 111.76,15.88 107.95,18.41 C37.- | U$2.CC2 121.92,8.26 v121.92,19.05 | U$2.BN2 156.84,8.26 156.84,16.51 v166.37,22.86 | U$2.BF2 175.26,8.26 175.26,18.41 178.44,21.59 C36.- 184.78,19.05 184.78,8.89 U$2.BC2 | U$2.AT1 214,8.89 v214,21.59 | U$2.AN1 226.06,8.26 v226.06,21.59 | U$2.AF1 245.75,8.26 v245.75,21.59 | E1.7 243.84,36.83 C35.- | C30.2 E34.8 | v32.38,114.3 32.38,147.32 v29.84,150.5 27.94,152.4 27.94,191.77 | E34.1 C31.2 | C33.2 E37.8 10.16,114.3 6.35,118.11 v6.35,135.89 | E32.1 C29.2 E33.7 | v154.31,43.18 153.13,43.2 | 153.13,43.2 E17.10 E17.11 144.15,46.99 | 144.15,46.99 E17.4 | v153.03,19.05 153.03,23.5 153.13,43.2 | C25.2 E28.7 | E24.7 C22.2 | E31.7 66.67,116.2 66.67,99.06 C27.2 | E29.1 C26.2 E30.7 | E23.7 C21.2 112.39,97.79 109.22,93.98 109.22,83.82 v110.49,81.92 | E8.7 C7.2 | v107.31,193.04 107.31,175.26 105.41,172.72 v105.41,169.54
  Top 0.813: v171.45,62.87 E14.7 170.81,81.92 170.81,95.25 168.28,97.79 | v193.04,67.31 C9.2 | v199.39,66.04 196.85,70.48 196.85,78.74 | 196.85,78.74 E10.7 | v220.34,66.04 218.44,67.94 E6.7 221.62,81.92 221.62,95.89 C6.2 217.17,100.33 217.17,103.5 220.34,107.31 220.34,112.39 E7.7 | C1.2 v243.84,66.04 E2.7 | 196.85,78.74 196.85,95.25 194.31,97.79 C10.2 191.77,101.6 191.77,111.12 E11.8 194.94,116.2 194.94,133.99 C11.2 E12.7 194.94,156.84 194.94,170.81 C12.2 | 168.28,97.79 170.81,99.69 170.81,106.05 167.64,109.86 E15.7 | C15.2 E16.7 | 168.28,97.79 C14.2 | v81.28,97.79 81.28,85.72 88.9,78.74 | 88.9,78.74 E26.7 | 88.9,78.74 88.9,76.2 87.63,74.93 87.63,69.85 92.71,66.04 92.71,56.52 E25.1 | E3.7 C2.2 | v238.76,116.84 238.76,136.53 C3.2 | E22.7 E21.1 E21.12 127.64,47.62 131.44,47.62 v132.72,48.26 | E27.7 C24.2 | C20.2 111.12,48.26 111.12,43.81 v109.86,39.37 107.95,37.47 C37.- | v93.34,19.05 93.34,26.04 91.44,28.57 E25.7 | v135.25,97.79 135.25,100.97 142.24,107.95 E19.8 | C18.2 144.15,95.25 144.15,80.64 E18.7 E17.1 144.15,52.7 144.15,46.99 | C19.2 142.24,151.13 144.78,153.67 144.78,167.64 E20.1
  Bottom 0.813: U$2.AC2 255.27,7.94 255.27,15.88 259.08,19.68 C35.- v245.75,21.59 | v245.75,21.59 v226.06,21.59 | v226.06,21.59 v214,21.59 | v214,21.59 184.78,21.59 | 184.78,21.59 C36.- 178.44,21.59 175.26,18.41 | U$2.BC2 185.1,9.21 184.78,9.53 184.78,21.59 | U$2.AT1 213.68,8.57 214,8.89 v214,21.59 | U$2.AN1 226.38,8.57 226.06,8.89 v226.06,21.59 | U$2.AF1 245.43,8.57 245.75,8.89 v245.75,21.59 | E8.7 220.34,156.84 220.34,172.09 C8.2 | C3.2 253.37,144.78 253.37,162.56 | 253.37,162.56 253.37,171.45 C4.2 | E4.13 253.37,162.56 | E1.7 246.38,41.27 246.38,57.15 C1.2 | 175.26,18.41 175.26,8.89 U$2.BF2 175.26,8.26 | v153.03,19.05 156.84,15.88 156.84,9.53 U$2.BN2 156.84,8.26 | U$2.CC2 121.92,8.89 v121.92,19.05 | v121.92,19.05 125.09,21.59 136.53,21.59 139.7,19.05 v143.51,19.05 143.51,8.89 U$2.BT2 143.51,8.26 | v121.92,19.05 119.38,21.59 C37.- 107.95,18.41 111.76,15.88 111.76,8.89 U$2.CF2 | U$2.DT2 10.79,8.26 v10.79,19.05 | v10.79,19.05 v23.5,19.05 23.5,8.26 U$2.DN2 | v10.79,19.05 8.89,20.95 v8.89,39.37 E35.7 | U$2.DF2 41.91,8.89 v41.91,19.05 v52.07,19.05 52.07,8.89 U$2.DC2 | v32.38,114.3 E34.8 E34.9 E34.10 | C31.2 v29.84,150.5 | C33.2 12.7,95.89 12.7,80.64 E36.7 E36.8 15.24,64.14 | C32.2 15.24,64.14 | E25.1 81.28,54.61 | 81.28,54.61 C23.2 | 81.28,54.61 77.47,54.61 75.56,50.8 E29.12 69.22,49.53 | 69.22,44.45 E29.10 76.83,41.27 85.72,41.27 88.27,39.37 E25.7 E25.10 | 69.22,44.45 69.22,46.99 | 69.22,46.99 69.22,49.53 | E29.6 69.22,43.18 69.22,44.45 | E29.1 69.22,53.34 69.22,49.53 | E29.4 69.22,46.99 | E32.10 50.8,45.72 50.8,48.26 E32.12 45.21,48.51 | 45.21,48.51 E32.4 | E32.1 42.55,54.61 45.21,48.51 | U$2.CT2 80.64,8.89 v80.64,19.05 v93.34,19.05 93.34,8.89 U$2.CN2
  Bottom 0.813: 175.26,18.41 170.18,21.59 v166.37,22.86 | C22.2 113.67,132.08 113.67,118.11 115.57,116.84 E23.7 | E27.7 93.34,118.11 93.34,133.35 C25.2 | E31.7 67.94,118.75 67.94,120.65 69.85,121.92 69.85,132.72 C28.2 | E33.7 43.18,80.64 43.18,95.89 C30.2 | E2.7 245.75,79.38 245.75,96.52 C2.2 | E22.7 114.3,78.74 v110.49,81.92 | E24.7 113.67,156.84 113.67,159.38 105.41,164.47 v105.41,169.54 | J.C2 10.79,202.56 v10.79,191.77 v17.14,191.77 | v17.14,191.77 v23.5,191.77 | v23.5,191.77 v45.72,191.77 | v45.72,191.77 v51.44,191.77 52.07,202.56 J.T1 | J.E1 17.14,202.56 v17.14,191.77 | J.H1 23.5,202.56 v23.5,191.77 | J.R1 45.72,202.56 v45.72,191.77 | C34.2 v6.35,135.89 | E20.10 156.84,160.02 159.38,162.56 162.56,162.56 163.83,161.29 163.83,158.12 E16.7 169.54,156.21 169.54,170.81 C16.2 | E7.7 220.34,118.75 220.34,133.99 C7.2 | E15.7 169.54,118.11 169.54,133.99 C15.2 | E19.8 144.78,116.2 144.78,133.35 C19.2 | C27.2 68.58,95.25 68.58,80.64 E30.7 | C24.2 89.53,100.33 83.82,100.33 v81.28,97.79 | C18.2 v135.25,97.79 | E9.7 194.94,41.27 194.94,59.05 C9.2 183.51,53.34 162.56,52.7 C17.2 v154.31,43.18 | E17.4 135.89,46.99 v132.72,48.26 | E21.10 121.92,46.35 121.92,48.26 E21.12 | E21.1 113.67,52.7 113.67,42.55 v109.86,39.37 | C26.2 63.5,60.33 61.59,57.78 56.52,57.78 48.26,62.87 44.45,62.87 C29.2 32.38,60.33 27.94,64.14 15.24,64.14 | H.M2 106.05,202.56 106.05,195.58 | 107.31,195.58 v107.31,193.04 | H.J2 96.52,202.56 96.52,195.58 99.06,195.58 | 99.06,195.58 102.23,195.58 | 102.23,195.58 106.05,195.58 | H.S2 118.11,202.56 118.11,195.58 114.94,195.58 | 114.94,195.58 112.39,195.58 | 112.39,195.58 108.58,195.58 | 108.58,195.58 107.31,195.58
  Bottom 0.813: 107.31,195.58 106.05,195.58 | H.K2 99.06,202.56 99.06,195.58 | H.L2 102.23,202.56 102.23,195.58 | H.N2 108.58,202.56 108.58,195.58 | H.P2 112.39,202.56 112.39,195.58 | H.R2 114.94,202.56 114.94,195.58 | v171.45,62.87 186.06,62.87 v193.04,67.31 v199.39,66.04 v220.34,66.04 v243.84,66.04 | E3.7 v238.76,116.84
GTF+IND
  Top 0.813: H.A1 73.66,201.29 73.66,193.68 67.94,190.5 67.94,185.42 66.04,182.88 50.8,182.88 48.26,185.42 48.26,201.93 J.S1
INCR_SC  (via drill 0.81)
  Top 0.813: E37.5 9.53,126.36 9.53,151.76 15.88,158.75 15.88,168.91 v13.34,172.09 | v100.33,175.9 99.69,179.07 99.69,187.32 102.23,190.5 102.23,193.68 99.69,196.22 99.69,201.93 H.K1
  Bottom 0.813: v13.34,172.09 81.92,172.09 84.77,175.58 99.69,175.58 v100.33,175.9
INIT  (via drill 0.81 pad 0.25)
  Top 0.813: U$2.CR1 87,8.89 87,24.13 85.72,26.04 85.72,71.12 83.82,77.47 80.01,80.64 80.01,94.61 79.38,95.25 79.38,100.97 80.64,102.87 80.64,121.92 79.38,123.83 79.38,126.36 80.01,127.64 80.01,138.43 v77.47,142.88 | v156.84,145.41 154.31,142.88 151.13,142.88 150.5,143.51 150.5,146.05 151.45,147.64 151.45,155.89 E20.9
  Bottom 0.813: v77.47,142.88 81.28,146.05 102.23,146.05 106.68,143.51 154.94,143.51 v156.84,145.41
INT_IN_PROG  (via drill 0.81)
  Top 0.813: E17.7 145.41,36.2 145.41,22.23 v147.96,19.05
  Bottom 0.813: U$2.BP2 153.67,8.89 153.67,14.61 v147.96,19.05
LAST_STEP_L
  Top 0.813: E33.8 46.35,80.64 46.35,87 E33.12 43.81,92.71 43.81,154.94 64.14,175.9 72.39,179.71 72.39,184.15 71.75,185.42 71.75,189.23 77.47,193.04 77.47,194.31 80.01,196.22 80.01,201.93 H.C1
  Bottom 0.813: E33.6 38.1,79.38 38.1,77.47 39.37,76.2 45.72,76.2 E33.8
LD_EIR  (via drill 0.81, 0.81 pad 0.25)
  Top 0.813: E12.8 203.2,156.84 205.1,156.84 207.01,154.94 207.01,125.73 203.84,123.19 203.84,101.6 205.74,99.69 205.74,88.9 203.2,86.36 E10.11 | v85.09,88.9 85.09,90.81 83.19,93.34 83.19,106.68 81.92,107.95 81.92,121.92 83.82,124.46 83.82,128.27 83.19,129.54 83.19,136.53 v87,141.6 | E28.13 95.89,164.47 95.89,144.15 v97.16,141.6
  Bottom 0.813: E6.11 E6.3 E10.11 E10.3 E14.11 E14.3 E18.11 E18.3 128.91,88.9 E22.11 E22.3 E26.11 E26.3 v85.09,88.9 | v97.16,141.6 v87,141.6
MA_MS_LC  (via drill 0.81)
  Top 0.813: v156.84,21.59 156.84,46.35 153.03,49.53 E17.12
  Bottom 0.813: U$2.BH2 172.09,8.26 172.09,17.14 169.54,19.05 159.38,19.05 v156.84,21.59
MD0  (via drill 0.81 pad 0.25)
  Top 0.813: U$2.AK1 236.22,8.89 v236.22,28.57 | v229.87,28.57 224.79,33.02 223.52,36.83 223.52,60.33 215.9,65.41 215.9,89.53 E6.2
  Bottom 0.813: v236.22,28.57 v229.87,28.57
MD1
  Top 0.813: E6.12 227.97,87.63 227.97,76.83 226.69,74.3 226.69,33.66 233.04,29.84 233.04,8.89 U$2.AL1
MD2  (via drill 0.81 pad 0.25)
  Top 0.813: U$2.AM1 229.87,8.89 229.87,25.4 v225.43,28.57 | v209.55,28.57 209.55,55.88 201.29,63.5 198.12,63.5 190.5,76.83 190.5,89.53 E10.2
  Bottom 0.813: v225.43,28.57 v209.55,28.57
MD3  (via drill 0.81)
  Top 0.813: v213.36,91.44 213.36,64.77 221.62,58.42 221.62,27.3 223.52,24.77 223.52,10.16 U$2.AP1
  Bottom 0.813: E10.12 v213.36,91.44
MD4
  Top 0.813: E14.2 165.1,89.53 165.1,74.3 168.28,62.87 174.62,54.61 174.62,41.27 172.09,38.1 172.09,20.95 166.37,16.51 166.37,8.89 U$2.BK1
MD5  (via drill 0.81 pad 0.25)
  Top 0.813: U$2.BL1 163.19,8.26 163.19,16.51 170.18,21.59 170.18,39.37 v172.09,42.55 | v176.53,42.55 176.53,62.87 172.09,75.56 172.09,85.72 E14.12
  Bottom 0.813: v172.09,42.55 v176.53,42.55
MD6  (via drill 0.81, 0.81 pad 0.25)
  Top 0.813: U$2.BM1 160.02,10.16 160.02,16.51 168.91,22.86 168.91,57.78 v165.74,63.5 | v137.79,64.77 139.06,66.04 139.06,79.38 135.25,82.55 v135.25,91.44
  Bottom 0.813: E18.2 v135.25,91.44 | v165.74,63.5 160.66,64.77 v137.79,64.77
MD7  (via drill 0.81, 0.81 pad 0.25)
  Top 0.813: v161.29,90.81 161.29,78.11 157.48,73.66 157.48,70.48 162.56,66.04 162.56,62.23 v165.74,56.52 165.74,48.9 164.47,44.45 164.47,24.13 153.03,16.51 153.03,8.89 U$2.BP1 | v104.78,57.78 98.42,57.78 95.25,55.24 95.25,48.26 E25.5
  Bottom 0.813: E18.12 v161.29,90.81 | v165.74,56.52 163.83,57.78 146.05,57.78 144.78,58.42 140.34,58.42 139.06,57.78 130.18,57.78 128.91,59.69 107.95,59.69 v104.78,57.78
MD8  (via drill 0.81, 0.81 pad 0.25)
  Top 0.813: v73.03,26.67 71.12,31.11 71.12,39.37 E29.9 75.56,43.81 75.56,46.99 76.83,48.9 76.83,52.7 81.92,60.33 81.92,63.5 80.64,64.77 v78.11,64.77 | U$2.DK1 32.38,8.89 v32.38,19.05 | v104.78,68.58 107.95,68.58 111.12,71.75 111.12,75.56 112.39,76.83 112.39,90.17 v111.76,91.44
  Bottom 0.813: E22.2 v111.76,91.44 | v73.03,26.67 67.94,21.59 57.15,21.59 55.24,23.5 36.83,23.5 v32.38,19.05 | v78.11,64.77 82.55,68.58 93.98,68.58 95.89,67.31 102.87,67.31 v104.78,68.58
MD9  (via drill 0.81, 0.81 pad 0.25)
  Top 0.813: U$2.DL1 29.21,8.89 v29.21,19.05 | v69.85,26.67 68.58,29.84 68.58,43.18 E29.11 75.56,49.53 75.56,53.98 78.74,58.42 v80.01,62.23 | v128.27,67.31 122.56,75.56 122.56,87 E22.12
  Bottom 0.813: v29.21,19.05 36.2,24.77 56.52,24.77 58.42,22.86 66.67,22.86 v69.85,26.67 | v80.01,62.23 83.82,67.31 93.34,67.31 95.25,66.04 126.36,66.04 v128.27,67.31
MD10  (via drill 0.81)
  Top 0.813: U$2.DM1 26.67,7.62 26.67,20.32 v30.48,23.5 | v53.98,67.31 55.88,63.5 55.88,59.05 59.05,55.88 59.05,26.04 60.96,24.13 64.14,24.13 v66.04,26.67 E29.7 | v90.81,71.75 93.34,75.56 93.34,90.17 E26.2
  Bottom 0.813: v30.48,23.5 31.75,23.5 34.92,26.04 58.42,26.04 60.33,24.13 64.14,24.13 v66.04,26.67 | v53.98,67.31 55.24,66.67 67.31,66.67 74.93,71.75 v90.81,71.75
MD11  (via drill 0.81)
  Top 0.813: U$2.DP1 20.32,8.26 20.32,21.59 22.23,23.5 v27.3,23.5 | v61.59,26.67 63.5,29.84 63.5,43.18 E29.5 60.33,46.99 60.33,56.52 57.15,59.69 v57.15,69.22 | v98.42,71.75 96.52,75.56 96.52,86.36 E26.12
  Bottom 0.813: v27.3,23.5 29.21,25.4 31.75,25.4 34.29,27.3 59.69,27.3 v61.59,26.67 | v57.15,69.22 67.94,69.22 75.56,74.3 96.52,74.3 v98.42,71.75
MODEA  (via drill 0.81)
  Top 0.813: v160.02,145.41 160.02,139.06 153.03,133.99 153.03,128.91 E19.14 | E2.9 256.86,83.82 256.86,151.76 E4.10
  Bottom 0.813: E4.10 247.01,153.67 243.21,147.32 184.15,147.32 180.97,143.51 177.8,143.51 175.9,145.41 v160.02,145.41
MODEB  (via drill 0.81, 0.81 pad 0.25)
  Top 0.813: v74.3,187.96 74.3,177.8 69.22,173.99 v69.22,154.31 | H.R1 114.94,201.29 114.94,195.58 113.67,194.31 113.67,186.06 116.2,183.51 116.2,177.8 109.22,171.45 109.22,158.75 v107.95,156.84 110.49,154.31 110.49,146.05 104.14,139.7 104.14,135.25 109.22,130.81 109.22,99.06 106.05,95.25 106.05,74.93 v108.58,73.03 | E2.8 253.37,75.56 253.37,51.44 E1.12
  Bottom 0.813: v69.22,154.31 84.45,154.31 87,151.76 93.98,151.76 95.89,153.67 95.89,158.75 E28.10 v107.95,156.84 | E2.8 248.92,77.47 245.11,71.75 238.76,71.75 237.49,73.03 182.88,73.03 179.71,69.85 158.12,69.85 154.94,70.48 132.72,70.48 131.44,71.75 126.36,71.75 125.09,70.48 111.12,70.48 v108.58,73.03 | H.A2 74.3,202.56 v74.3,187.96
N$1
  Top 0.813: E7.2 212.72,125.73 212.72,96.52 213.36,95.89 219.07,95.89 220.34,94.61 220.34,83.19 E6.6
N$2
  Top 0.813: E7.3 223.52,122.56 223.52,81.28 E6.8
N$3
  Top 0.813: E15.1 165.1,130.49 165.1,109.86 168.91,105.41 168.91,100.97 168.28,100.33 166.37,100.33 165.1,99.06 165.1,96.52 165.74,95.89 168.28,95.89 169.54,94.61 169.54,86.36 E14.5
  Bottom 0.813: E15.1 165.1,133.99 146.69,133.99 144.15,137.79 140.34,137.79 137.79,133.99 127.95,133.99 125.41,137.79 121.28,137.79 118.11,132.08 E23.1
N$4  (via drill 0.81 pad 0.25)
  Top 0.813: E7.4 214.63,121.92 214.63,99.06 v215.26,97.79 | v188.59,99.06 191.13,95.89 194.31,95.89 195.58,94.61 195.58,83.82 E10.6
  Bottom 0.813: v215.26,97.79 212.72,101.6 190.5,101.6 v188.59,99.06
N$5  (via drill 0.81 pad 0.25)
  Top 0.813: E10.8 202.56,78.74 208.28,86.36 208.28,107.95 v209.55,109.86 | v217.17,109.86 215.9,111.76 215.9,120.02 E7.5
  Bottom 0.813: v209.55,109.86 v217.17,109.86
N$6  (via drill 0.81)
  Top 0.813: E2.1 239.4,92.71 233.68,99.69 v233.68,116.84
  Bottom 0.813: E7.8 v233.68,116.84
N$7  (via drill 0.81 pad 0.25)
  Top 0.813: E26.8 100.65,80.01 100.65,98.74 v99.06,100.97 | E7.6 221.62,116.2 221.62,102.87 v220.34,100.97
  Bottom 0.813: v99.06,100.97 102.23,97.16 113.03,97.16 115.57,100.33 157.48,100.33 159.38,98.42 163.19,98.42 165.74,101.6 187.32,101.6 188.59,102.87 217.81,102.87 v220.34,100.97
N$8  (via drill 0.81)
  Top 0.813: v135.25,75.56 130.81,81.28 130.81,108.58 134.62,112.39 134.62,121.92 v132.08,123.83 | E15.2 170.81,126.36 170.81,111.12 179.07,102.87 179.07,82.55 180.34,81.28 180.34,78.74 179.71,78.11 178.44,78.11 E14.9
  Bottom 0.813: E23.2 119.38,129.54 121.92,133.99 125.09,133.99 v132.08,123.83 | E14.9 170.81,75.56 164.47,75.56 162.56,77.47 154.31,77.47 152.4,74.93 136.53,74.93 v135.25,75.56
N$9  (via drill 0.81)
  Top 0.813: v154.31,124.46 153.03,123.19 153.03,118.11 155.57,114.94 155.57,107.95 149.86,101.6 142.24,101.6 139.7,99.06 139.7,82.55 E18.6 | v146.05,147.96 146.05,128.27 E19.13
  Bottom 0.813: E28.9 108.58,153.67 113.67,148.59 130.81,148.59 132.08,149.86 137.16,149.86 140.34,147.32 144.15,147.32 v146.05,147.96 | E19.13 v154.31,124.46 157.48,127 E15.3
N$10  (via drill 0.81)
  Top 0.813: v160.02,124.46 160.66,123.19 160.66,101.6 158.75,99.69 158.75,81.28 153.03,76.2 149.22,76.2 147.96,77.47 147.96,79.38 E18.9
  Bottom 0.813: E15.4 v160.02,124.46
N$11  (via drill 0.81 pad 0.25)
  Top 0.813: E22.5 118.75,81.92 118.75,76.83 118.11,76.2 118.11,73.03 126.36,64.14 130.18,64.14 132.72,66.67 v132.72,75.56 | v177.8,81.28 177.8,102.23 169.54,110.49 169.54,120.02 E15.5
  Bottom 0.813: v132.72,75.56 134.62,73.03 153.03,73.03 154.94,75.56 161.93,75.56 163.83,73.66 175.9,73.66 177.8,76.2 v177.8,81.28
N$14  (via drill 0.81)
  Top 0.813: E23.3 120.02,123.83 v120.02,74.93
  Bottom 0.813: E18.5 132.72,83.82 123.19,74.93 v120.02,74.93
N$15  (via drill 0.81 pad 0.25)
  Top 0.813: E18.8 151.76,80.01 151.76,81.92 153.03,83.82 153.03,98.42 v157.48,103.5 | v111.76,103.5 111.76,121.28 E23.4
  Bottom 0.813: v157.48,103.5 156.21,102.87 113.67,102.87 v111.76,103.5
N$16  (via drill 0.81, 0.81 pad 0.25)
  Top 0.813: E23.5 118.75,120.02 118.75,96.52 118.11,95.89 115.57,95.89 113.67,93.98 113.67,82.55 114.94,81.28 | 114.94,81.28 E22.6 | E11.12 202.56,120.02 v202.56,97.79 | v153.67,80.64 156.21,83.19 v156.21,97.79 157.48,100.33 159.38,102.23 159.38,120.02 v158.12,121.92 | v113.03,74.3 114.3,75.56 114.3,80.01 114.94,81.28
  Bottom 0.813: E19.12 v158.12,121.92 | v202.56,97.79 200.03,100.33 191.77,100.33 189.23,97.16 177.8,97.16 175.26,100.33 167,100.33 164.47,97.16 157.48,97.16 v156.21,97.79 | v153.67,80.64 150.5,76.2 140.34,76.2 138.43,78.11 128.91,78.11 123.19,73.03 114.3,73.03 v113.03,74.3
N$17  (via drill 0.81)
  Top 0.813: v110.49,78.11 107.31,81.28 107.31,94.61 113.67,101.6 113.67,117.47 E23.6
  Bottom 0.813: E22.9 118.11,76.2 114.94,76.2 v110.49,78.11
N$18  (via drill 0.81)
  Top 0.813: v86.36,114.3 86.36,95.89 88.9,93.34 88.9,85.72 E26.5
  Bottom 0.813: E23.11 120.65,121.92 120.65,116.84 118.11,114.3 v86.36,114.3
N$19  (via drill 0.81)
  Top 0.813: v52.7,111.12 v52.7,127
  Bottom 0.813: E35.12 20.32,50.8 16.51,57.15 12.06,57.15 8.89,60.33 8.89,115.57 E37.6 19.05,117.47 19.05,109.86 | 19.05,109.86 15.24,106.05 15.24,102.87 16.51,101.6 31.75,101.6 33.02,100.33 33.02,94.61 36.2,91.44 E33.2 E33.3 | E31.3 v52.7,127 | 19.05,109.86 50.8,109.86 v52.7,111.12
N$20  (via drill 0.81, 0.81 pad 0.25)
  Top 0.813: E33.11 50.16,88.27 50.16,89.53 E33.13 50.16,93.34 50.16,104.78 54.61,109.86 v54.61,157.48 | E28.6 87.63,155.57 87.63,146.05 v82.55,142.88 | v174.62,142.24 171.45,146.05 171.45,163.83 E16.13
  Bottom 0.813: E28.6 v54.61,157.48 | v82.55,142.88 85.09,144.78 101.6,144.78 106.05,142.24 163.19,142.24 164.47,144.15 172.72,144.15 v174.62,142.24
N$21  (via drill 0.81 pad 0.25)
  Top 0.813: E19.15 151.76,131.44 151.76,135.89 v154.94,138.43 | v202.56,140.34 202.56,128.27 E11.14
  Bottom 0.813: E11.14 204.47,127 215.9,112.39 246.38,112.39 E3.8 | v154.94,138.43 161.93,138.43 165.1,142.24 172.09,142.24 174.62,139.7 200.66,139.7 v202.56,140.34
N$22
  Top 0.813: E2.12 247.65,92.08 247.65,156.21 E4.12
N$23
  Top 0.813: E4.9 255.59,148.59 255.59,85.72 E2.10
N$24  (via drill 0.81 pad 0.25)
  Top 0.813: E3.4 240.66,122.56 v240.66,97.79 | v88.27,97.79 88.27,116.84 E27.6
  Bottom 0.813: v240.66,97.79 238.76,95.89 89.53,95.89 v88.27,97.79
N$25
  Bottom 0.813: E11.15 204.47,129.54 216.53,114.3 245.75,114.3 247.01,115.57 247.01,118.11 E3.6
N$26  (via drill 0.81, 0.81 pad 0.25)
  Top 0.813: v62.87,111.76 61.59,109.86 61.59,90.81 62.87,89.53 62.87,83.19 E30.6 v80.01,69.85 | E1.11 252.73,46.99 255.91,50.16 v255.91,74.93
  Bottom 0.813: E31.9 71.12,117.47 71.12,115.57 67.31,111.76 v62.87,111.76 | v255.91,74.93 250.19,68.58 236.22,68.58 234.31,70.48 184.78,70.48 182.25,67.31 158.12,67.31 154.94,67.94 130.81,67.94 129.54,69.22 127.64,69.22 125.73,67.31 109.22,67.31 106.68,69.85 102.87,69.85 101.6,68.58 96.52,68.58 94.61,69.85 v80.01,69.85
N$27
  Bottom 0.813: E4.6 231.14,151.13 165.1,151.13 161.93,153.67 154.94,153.67 152.4,151.76 144.15,151.76 142.88,150.5 140.97,150.5 137.16,153.03 130.81,153.03 128.91,151.13 114.94,151.13 111.12,154.94 111.12,158.75 105.41,162.56 101.6,162.56 E28.12
N$28
  Bottom 0.813: E1.6 238.76,41.91 237.49,40.64 237.49,37.47 236.22,36.2 142.24,36.2 132.72,45.09 129.54,45.09 127.64,48.26 127.64,52.7 E21.14
N$29
  Bottom 0.813: E1.3 239.4,52.7 233.04,52.7 231.78,51.44 231.78,44.45 236.22,40.64 236.22,38.1 235.59,37.47 147.96,37.47 144.15,41.27 144.15,50.8 E17.2
N$30  (via drill 0.81)
  Top 0.813: v32.38,85.72 31.11,83.82 31.11,54.61 36.2,49.53 E32.3
  Bottom 0.813: E36.1 17.78,95.89 24.13,95.89 v32.38,85.72
N$31  (via drill 0.81)
  Top 0.813: E32.2 37.47,52.07 34.29,55.24 v34.29,63.5
  Bottom 0.813: E36.6 17.78,79.38 17.78,71.75 19.68,69.85 29.53,69.85 v34.29,63.5
N$32  (via drill 0.81)
  Top 0.813: E32.13 45.09,55.88 v45.09,69.22
  Bottom 0.813: E36.10 28.57,78.74 36.2,69.22 v45.09,69.22
N$33  (via drill 0.81)
  Top 0.813: E32.14 49.53,56.52 49.53,61.59 48.26,62.87 48.26,74.3 v51.44,78.11
  Bottom 0.813: E36.15 24.13,91.44 38.1,74.3 47.62,74.3 v51.44,78.11
N$34
  Top 0.813: E37.15 24.45,128.27 24.45,87.63 E36.13
N$35
  Top 0.813: E37.1 17.46,133.67 23.5,133.67 25.72,131.13 25.72,86.04 E36.12
N$36
  Top 0.813: E36.4 12.06,88.9 12.06,93.98 13.97,95.89 15.88,95.89 17.14,97.16 17.14,98.42 19.68,101.6 19.68,114.3 E37.10
N$37
  Top 0.813: E36.3 17.14,90.81 17.14,93.34 19.05,95.25 19.05,98.42 22.23,102.23 22.86,102.87 E37.9
N$38  (via drill 0.81, 0.81 pad 0.25)
  Top 0.813: v41.27,141.6 42.55,140.34 42.55,128.91 E34.3 42.55,125.09 42.55,95.89 E33.1 43.18,91.44 43.18,39.37 v47.62,32.38 | E9.6 191.13,41.91 190.5,41.27 190.5,32.38 v192.41,29.21
  Bottom 0.813: E31.2 46.35,141.6 v41.27,141.6 | v192.41,29.21 192.41,27.94 191.13,26.67 187.96,26.67 186.69,27.94 132.08,27.94 131.44,27.3 113.67,27.3 112.39,28.57 99.06,28.57 95.25,31.75 49.53,31.75 v47.62,32.38
N$39  (via drill 0.81)
  Top 0.813: E37.3 10.79,130.18 10.79,151.13 v19.05,160.02 | v73.66,162.56 v73.66,167
  Bottom 0.813: E35.2 6.99,57.15 6.99,123.19 E37.3 | E16.1 164.15,173.04 154.31,173.04 153.03,174.62 138.43,174.62 134.62,171.45 127.64,171.45 125.73,173.04 120.97,173.04 119.7,171.77 90.49,171.77 87.63,168.91 75.56,168.91 v73.66,167 | E28.4 v73.66,162.56 21.59,162.56 v19.05,160.02
N$40  (via drill 0.81)
  Top 0.813: E37.2 12.06,132.08 12.06,148.59 v22.86,160.02 | v61.59,119.38 58.42,121.92 58.42,125.09 60.33,127 v60.33,160.02
  Bottom 0.813: E37.2 4.45,125.09 4.45,50.16 E35.5 | E31.6 v61.59,119.38 | E28.5 v60.33,160.02 v22.86,160.02
N$41  (via drill 0.81)